# Altium PCB DS18B20U Module PCB.PcbDoc
Units mil, origin at the board's own origin, x right, y up, seen from the top; angles counter-clockwise.
Board outline 600 x 500 mil, 2 copper layers (Top Layer, Bottom Layer); 8 components, 3 nets, 21 pads, 0 vias.
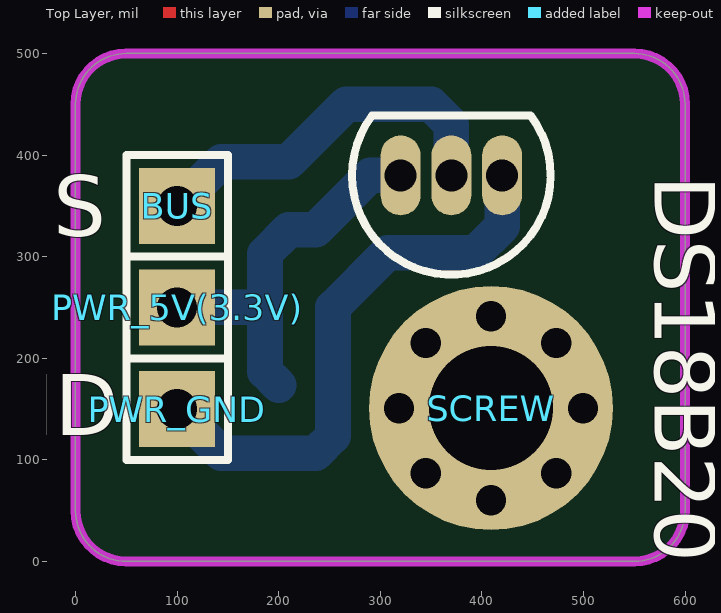
[diagram p0: Top Layer view]
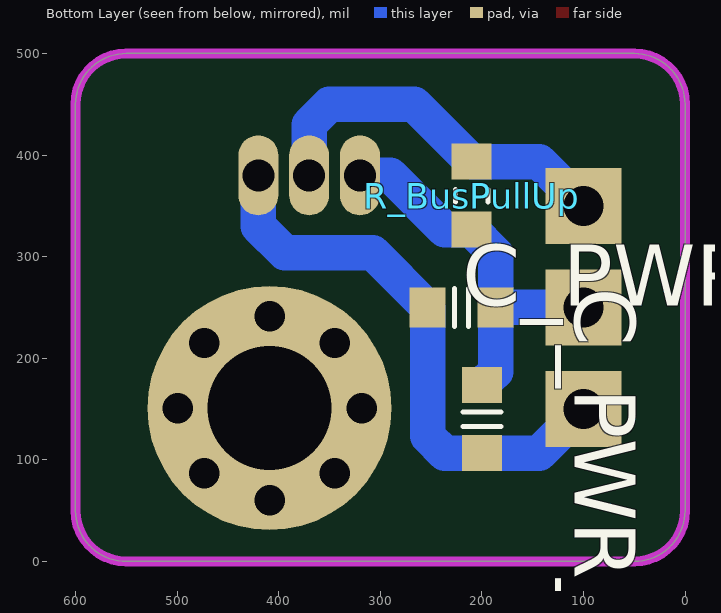
[diagram p1: Bottom Layer view, seen from below]
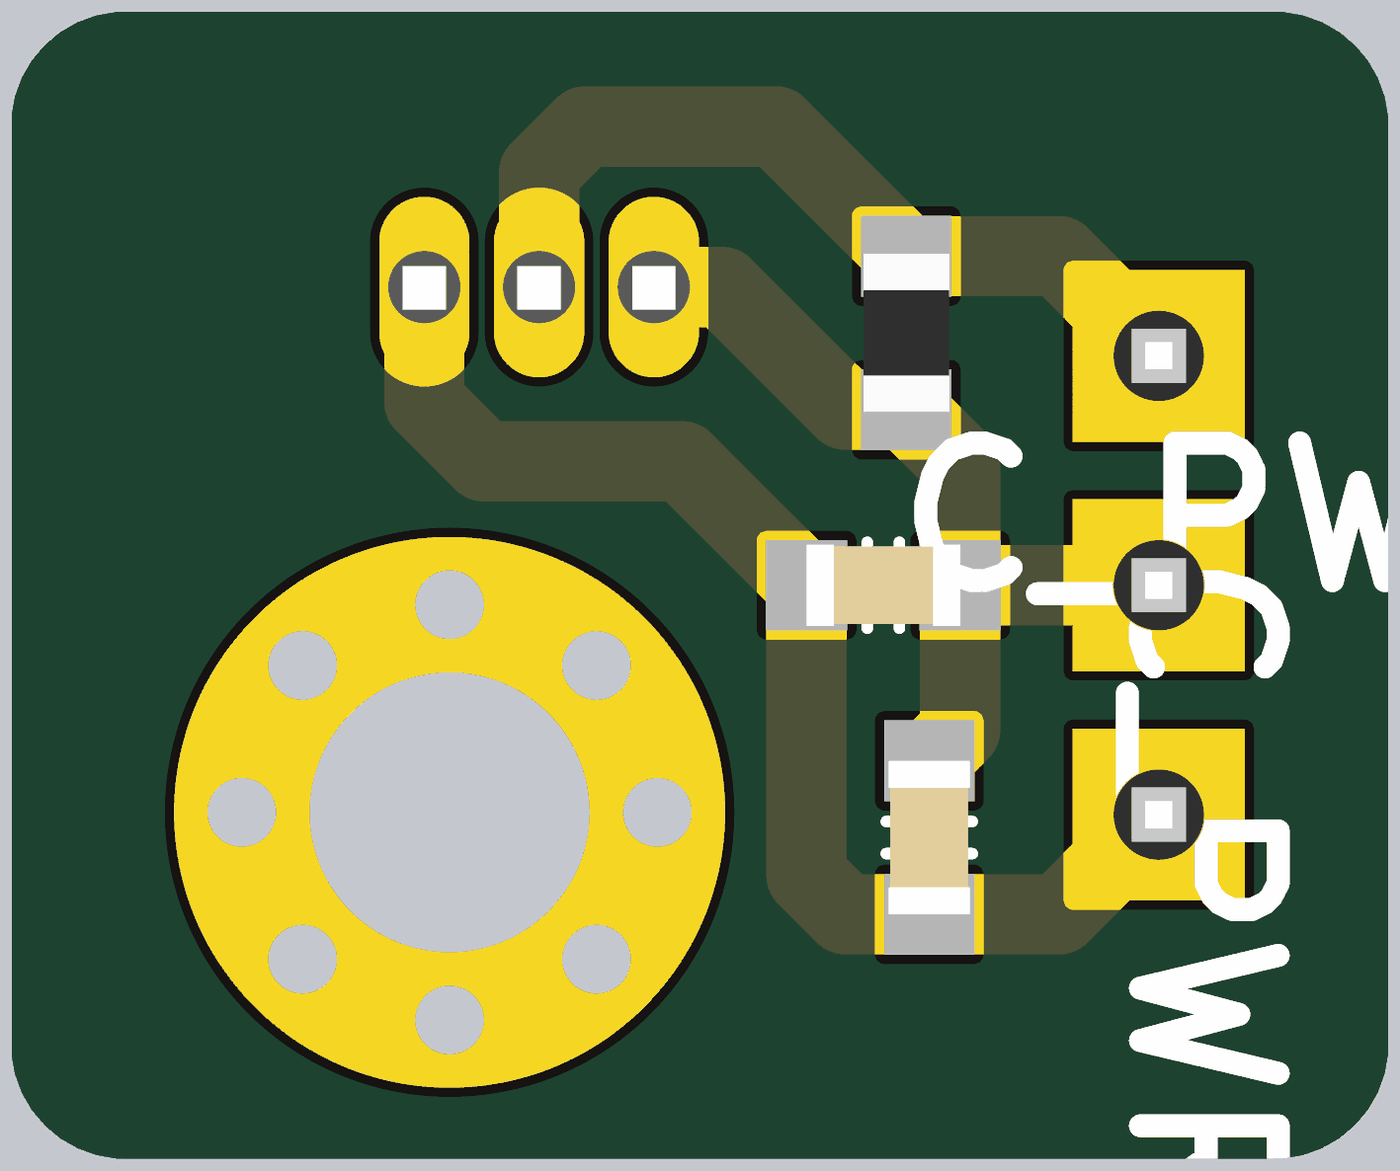
[diagram p2: 3D render of the assembled board from below, using the file's embedded part models]

## Layer stack, top to bottom
Top Layer: signal copper 1.4
Dielectric: dielectric 12.6, FR-4, Dk 4.8
Bottom Layer: signal copper 1.4

## Board outline
50,0 cw(c50,50) 0,50 0,450 cw(c50,450) 50,500 550,500 cw(c550,450) 600,450 600,50 cw(c550,50) 550,0 50,0

## Design rules (kind name [scope] priority, off if disabled: settings)
Clearance polygon [InPolygon] p1: gap=20
Clearance general [All] p2: gap=10
ComponentClearance [All] p1 off: gap=0 collisioncheckmode=3 verticalgap=10 showdistances=FALSE
HoleSize [All] p1: absolutevalues=TRUE maxlimit=200 minlimit=12 maxpercent=80.000 minpercent=20.000
PlaneConnect [All] p1: planeconnectstyle=Relief reliefexpansion=20 reliefentries=4 reliefconductorwidth=25 reliefairgap=10
PolygonConnect [All] p1: connectstyle=Relief reliefconductorwidth=25 reliefentries=4 polygonreliefangle="90 Angle" airgapwidth=10
RoutingLayers [All] p1: top layer_v5=FALSE bottom layer_v5=TRUE
RoutingVias [All] p1: holewidth=28 width=50 viastyle="Through Hole" minholewidth=28 minwidth=50 maxholewidth=28 maxwidth=50
ShortCircuit [All] p1: allowed=TRUE
SilkToSilkClearance [All] p1 off: silktosilkclearance=0
SilkToSolderMaskClearance [IsPad] p1: minsilkscreentomaskgap=0 clearancetoexposedcopper=FALSE
SolderMaskExpansion [All] p1: expansion=4
Width [All] p1: maxlimit=35 minlimit=35 preferedwidth=35
21 further rules are at their usual default settings.

## Components (designator, comment, footprint, x,y, rotation, side; value= is the part's Value field where it differs from the comment)
BUS "HDR1X1_180_2.54" HDR1X1_180_2.54 100,350 r0 top
C_PWR_Decouple1 "Cap_0603" CAP_0603 220,250 r180 bottom
C_PWR_Decouple2 "Cap_0603" CAP_0603 200,140 r90 bottom
DS18B20 "DS18B20" TO-92 370,380 r90 top
PWR_5V(3.3V) "HDR1X1_180_2.54" HDR1X1_180_2.54 100,250 r90 top
PWR_GND "HDR1X1_180_2.54" HDR1X1_180_2.54 100,150 r90 top
R_BusPullUp "Res_0603" RES_0603 210,360 r90 bottom
SCREW "M3" SCRREW_M3 409,151 r0 top

## Footprints (in the part's own frame and the unit in brackets; to place one, negate y for a bottom-side part, rotate by r counter-clockwise, add the part's x,y. Pads: shape width x height; smd on the part's side, far side on the other; paste and mask are expansions set on the pad)
CAP_0603 [mm] "Chip Capacitor, Body 1.6x0.8mm, 0603, IPC Medium Density"
  rect 0.9x1 smd: 1(-0.85,0) 2(0.85,0)
  Top Layer pour cut-out: -0.4,0.6 0.4,0.6 0.4,-0.6 -0.4,-0.6
  silkscreen extent -0.18,-0.48 0.18,0.48, body extent -0.85,-0.45 0.85,0.45, height 0.89
HDR1X1_180_2.54 [mm] "Connector; Header; 2 Position"
  rect 1.905x1.905 hole 1: 1(0,0)
  silkscreen extent -1.27,-1.27 1.27,1.27, body extent -1.27,-1.27 1.27,1.27, height 7.58
RES_0603 [mm]
  rect 0.9x1 smd: 1(-0.85,0) 2(0.85,0)
  Top Layer pour cut-out: -0.4,0.6 0.4,0.6 0.4,-0.6 -0.4,-0.6
  silkscreen extent -0.15,-0.41 0.15,0.41, body extent -0.87,-0.47 0.88,0.48, height 0.54
SCRREW_M3 [mil]
  round 50 hole 30: 0(-90.55,0) 0(-64.03,-64.03) 0(-64.03,64.03) 0(0,-90.55) 0(0,90.55) 0(64.03,-64.03) 0(64.03,64.03) 0(90.55,0)
  round 240.16 hole 122.05: 0(0,0)
TO-92 [mm] "TO, Flat Index; 3 In-Line, Axial Leads; Body Dia. 4.5mm; Leads 0.51 x 0.48 mm (max)"
  oval 2x1 hole 0.8: 1(0,-1.27) 2(0,0) 3(0,1.27)
  silkscreen extent -2.48,-2.48 1.5,2.48, body extent -2.41,-2.4 1.59,2.4, height 6.55

## Part data
BUS PWR_5V(3.3V) PWR_GND: "Header"
C_PWR_Decouple1 C_PWR_Decouple2: "Capacitor"
DS18B20: library part "DS18B20 TO-92", "DS18B20 TO-92"
R_BusPullUp: "Resistor"
SCREW: library part Screw_M3, "Screw"

## Nets (pads, with @x,y where several pads share a name; then routed paths per layer and width w, separated by ;. In a path a pad name is that pad's centre, name@x,y a point inside that pad or via, vN(x,y) a via of type N, cw(c..) or ccw(c..) an arc to the next point about the centre after c; other vN are vias at no path point)
NetBUS_1: BUS.1 DS18B20.2 R_BusPullUp.2 | length 369.7
  Bottom Layer w35: BUS.1 143.46,393.46 R_BusPullUp.2 266.54,450 350,450 370,430 DS18B20.2
NetC_PWR_Decouple1_1: C_PWR_Decouple1.1 C_PWR_Decouple2.1 DS18B20.1 PWR_GND.1 | length 554.7
  Bottom Layer w35: PWR_GND.1 143.46,106.54 C_PWR_Decouple2.1 236.54,106.54 253.46,123.46 C_PWR_Decouple1.1 307.46,304 394,304 420,330 DS18B20.1
NetC_PWR_Decouple1_2: C_PWR_Decouple1.2 C_PWR_Decouple2.2 DS18B20.3 PWR_5V(3.3V).1 R_BusPullUp.1 | length 387
  Bottom Layer w35: 100,250 C_PWR_Decouple1.2 ; C_PWR_Decouple2.2 186.54,186.93 C_PWR_Decouple1.2 ; DS18B20.3 290,380 236.54,326.54 R_BusPullUp.1 186.54,303.07 C_PWR_Decouple1.2
pads on no net: SCREW.0

## Keep-outs
Keep-Out Layer:
  lines w10: 0,50 ccw(c50,50) 50,0 100,0 500,0 550,0 ccw(c550,50) 600,50 600,450 ccw(c550,450) 550,500 50,500 ccw(c50,450) 0,450 0,400 0,100 0,50

## Silkscreen, mask and mechanical layers (free items; w line width, h text height)
Mechanical 15:
  lines w10: 0,450 0,610 ; 0,550 0,570 ; 49.08,560 0,560 ; 60,540 0,560 ; 60,580 0,560 ; 540,540 600,560 ; 540,580 600,560 ; 550,0 840,0 ; 550,500 800,500 ; 550.92,560 600,560 ; 600,450 600,620 ; 600,550 600,570 ; 610,-60 630,0 ; 610,560 630,500 ; 620,0 640,0 ; 620,500 640,500 ; 630,-100 630,0 ; 630,600 630,500 ; 650,-60 630,0 ; 650,560 630,500
  text "600 (mil)" at 59.08,524.01 h60
  text "500 (mil)" at 773.96,9.08 h60 r90